# EAGLE board TSOC-ESP8266-EM-2-0 (EAGLE 6.6.0)
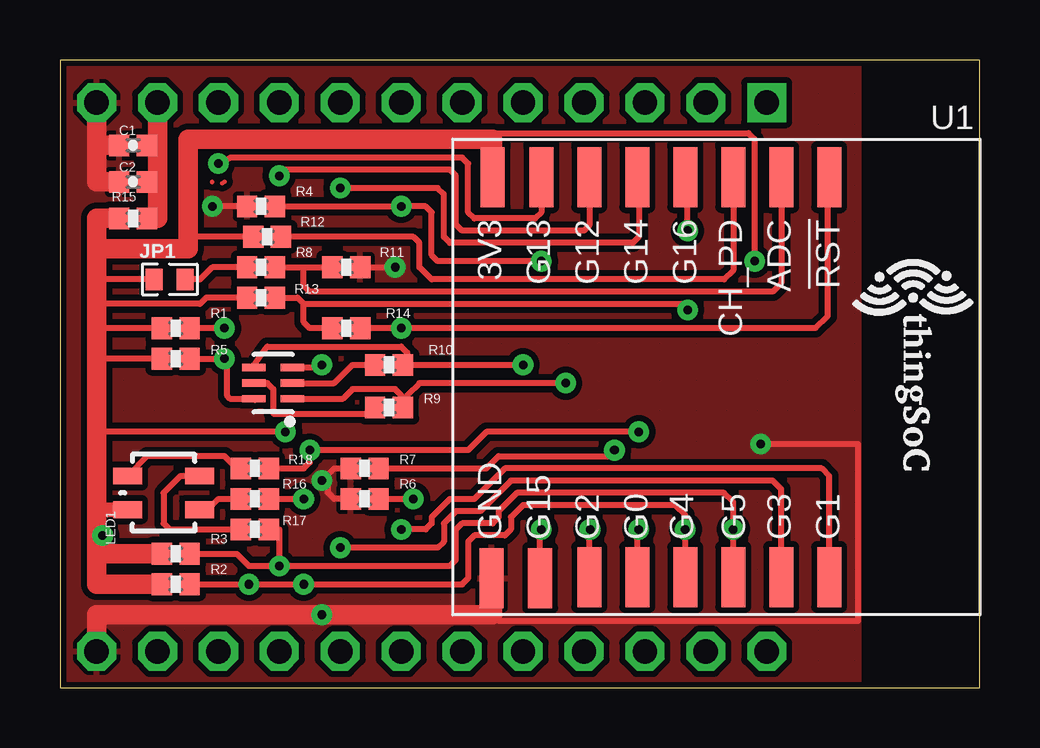
[diagram p0: board, top side]
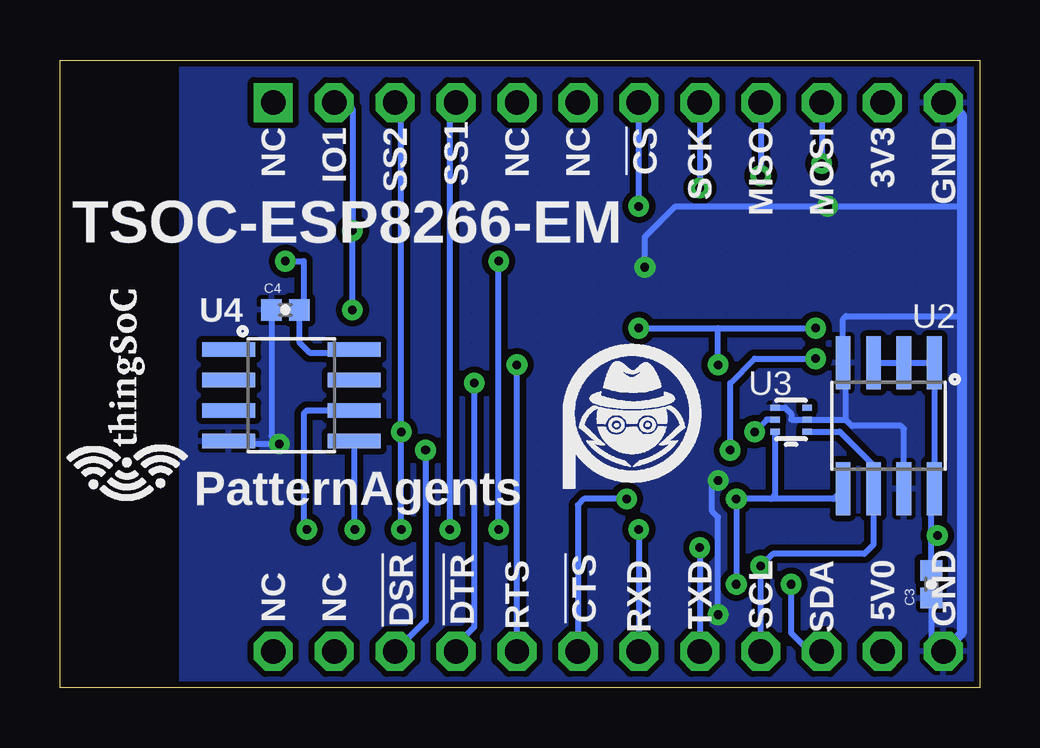
[diagram p1: board, bottom side, seen from below]

Size 38.35 x 26.16 mm. Coordinates in mm from the lower left corner, seen from the top.
Outline: 0,0 38.35,0 38.35,26.16 0,26.16 0,0
Copper layers (1*16): Top 0.035mm / dielectric 1.5mm / Bottom 0.035mm
Design rules "PatternAgents_7mil": minimum track width 7mil, minimum drill 14mil, track to track 7mil, track to pad 7mil, pad to pad 7mil, via to via 7mil, smd to smd 7mil, copper to edge 7mil, drill to drill 7mil, minimum pad ring 12mil, minimum via ring 10mil, stop-mask expansion 4mil, vias tented up to drill 25mil, thermal gap 7mil

## Footprints (pad centres in the part's own frame; a part is rotated, then mirrored left to right if it is on the bottom)
0402-CAP = smd 0.85 x 0.9: 1 -0.58,0; 2 0.58,0
JMP-2-NO-0402 = smd 0.7 x 0.9: 1 -0.65,0; 2 0.65,0
LED-TRICOLOR-SMD = smd 0.7 x 1.2: A 0.7,-1.5; B 0.7,1.5; G -0.7,1.5; R -0.7,-1.5
SOT363 = smd 0.3 x 0.99: 1 -0.65,-0.8; 2 0,-0.8; 3 0.65,-0.8; 4 0.65,0.81; 5 0,0.81; 6 -0.65,0.81
0402-RES = smd 0.85 x 0.9: 1 -0.58,0; 2 0.58,0
TSOC-BB-S24 = drill 1.016 square: 1B -11.43,-11.43 | drill 1.016 octagon: 1C -11.43,11.43; 2B -8.89,-11.43; 2C -8.89,11.43; 3B -6.35,-11.43; 3C -6.35,11.43; 4B -3.81,-11.43; 4C -3.81,11.43; 5B -1.27,-11.43; 5C -1.27,11.43; 6B 1.27,-11.43; 6C 1.27,11.43; 7B 3.81,-11.43; 7C 3.81,11.43; 8B 6.35,-11.43; 8C 6.35,11.43; 9B 8.89,-11.43; 9C 8.89,11.43; 10B 11.43,-11.43; 10C 11.43,11.43; 11B 13.97,-11.43; 11C 13.97,11.43; 12B 16.51,-11.43; 12C 16.51,11.43
ESP8266-12W = smd 1 x 2.5: 3V3 8.888,-8.582; !RST -5.144,-8.582; ADC -3.144,-8.582; CH_PD -1.144,-8.582; G0 2.856,8.082; G1 -5.144,8.082; G2 4.856,8.082; G3 -3.144,8.082; G4 0.856,8.082; G5 -1.144,8.082; G12 4.856,-8.582; G13 6.856,-8.582; G14 2.856,-8.582; G15 6.904,8.126; G16 0.856,-8.582; GND 8.936,8.126
SO08 = smd 0.61 x 2.21: 1 -1.905,-2.616; 2 -0.635,-2.616; 3 0.635,-2.616; 4 1.905,-2.616; 5 1.905,2.616; 6 0.635,2.616; 7 -0.635,2.616; 8 -1.905,2.616
SOT563 = smd 0.25 x 0.4: 1 -0.5,-0.66; 2 0,-0.66; 3 0.5,-0.66; 4 0.5,0.66; 5 0,0.66; 6 -0.5,0.67
SOIC8 = smd 0.61 x 2.21: 1 -1.905,-2.616; 2 -0.635,-2.616; 3 0.635,-2.616; 4 1.905,-2.616; 5 1.905,2.616; 6 0.635,2.616; 7 -0.635,2.616; 8 -1.905,2.616

## Placement (x,y rotation side)
C1  1.0uF  [0402-CAP]  3.05,22.61 180 top
C2  0.1uF  [0402-CAP]  3.05,21.08 180 top
C3  0.1uF  [0402-CAP]  2.03,4.32 90 bottom
C4  0.1uF  [0402-CAP]  28.96,15.75 0 bottom
JP1  [JMP-2-NO-0402]  4.57,17.02 0 top
LED1  LED-TRICOLOR  [LED-TRICOLOR-SMD]  4.32,8.13 270 top
Q1  MMBT2222A  [SOT363]  8.89,12.7 90 top
R1  10K  [0402-RES]  4.83,14.99 180 top
R2  4K7  [0402-RES]  4.83,4.32 180 top
R3  4K7  [0402-RES]  4.83,5.59 180 top
R4  10K  [0402-RES]  8.38,20.07 0 top
R5  10K  [0402-RES]  4.83,13.72 180 top
R6  10K  [0402-RES]  12.7,7.87 0 top
R7  10K  [0402-RES]  12.7,9.14 0 top
R8  10K  [0402-RES]  8.38,17.53 180 top
R9  10K  [0402-RES]  13.72,11.68 180 top
R10  10K  [0402-RES]  13.72,13.46 180 top
R11  4K2  [0402-RES]  11.94,17.53 0 top
R12  10K  [0402-RES]  8.64,18.8 180 top
R13  10K  [0402-RES]  8.38,16.26 180 top
R14  4K7  [0402-RES]  11.94,14.99 0 top
R15  0.01  [0402-RES]  3.05,19.56 0 top
R16  560  [0402-RES]  8.13,7.87 180 top
R17  560  [0402-RES]  8.13,6.6 180 top
R18  560  [0402-RES]  8.13,9.14 180 top
TSOC  TSOC-24-BB  [TSOC-BB-S24]  18.03,12.95 180 top
U1  ESP8266-12-12W  [ESP8266-12W]  26.92,12.7 180 top
U2  EEPROM-I2CSMD  [SO08]  3.81,10.92 180 bottom
U3  TMP102  [SOT563]  7.87,11.18 90 bottom
U4  ATECC108  [SOIC8]  28.7,12.19 270 bottom
U$11  PA_LOGO_SYMMED  [PA_LOGO_AGENT_MED_SYM]  14.48,10.92 0 bottom
U$19  TSOC-LOGO-MED  [TSOC-LOGO-MED]  35.56,9.4 90 bottom
U$20  TSOC-LOGO-MED  [TSOC-LOGO-MED]  35.56,16.26 270 top

## Library data of the parts
C1-C4 R1-R18 = PatternAgents-ProtoPads
JP1 = PatternAgents-ProtoPads; BOM: EXCLUDE
LED1 = SparkFun-LED
Q1 = SparkFun-DiscreteSemi
TSOC U$19 U$20 = thingSoC
U1 = PatternAgents_RFmodules
U2 = SparkFun-DigitalIC
U3 = SparkFun-Sensors; PROD_ID: IC-09303
U4 = SparkFun-DigitalIC; PROD_ID: IC-11982
U$11 = PatternAgents-Logos

## Nets
3V3: C3.2 C4.2 JP1.1 LED1.A R1.2 R2.2 R3.2 R5.2 R12.2 R13.2 R15.1 U1.3V3 U2.1 U2.2 U2.3 U2.8 U3.5 U4.8
3V3I: C1.1 C2.1 R15.2 TSOC.11B
!CTS: R6.2 TSOC.6C
!DCD: TSOC.2C
!DSR: R7.2 TSOC.3C
!DTR: Q1.1 R9.1 TSOC.4C
!RI: TSOC.1C
!RST: Q1.3 R1.1 R14.2 U1.!RST
!RTS: Q1.4 R10.1 TSOC.5C
ADC: R8.1 R11.1 U1.ADC
ADC_RAW: JP1.2 R8.2
BLU: LED1.B R16.2
CH_PD: R12.1 U1.CH_PD
GND: C1.2 C2.2 C3.1 C4.1 R4.1 R6.1 R7.1 R11.2 TSOC.12B TSOC.12C U1.GND U2.4 U2.7 U3.2 U3.4 U4.4
GPIO0: Q1.6 R5.1 R18.1 TSOC.3B U1.G0
GPIO1: TSOC.7C U1.G1
GPIO2: TSOC.4B U1.G2
GPIO3: TSOC.8C U1.G3
GPIO4: R2.1 R16.1 TSOC.10C U1.G4 U2.5 U3.6 U4.5
GPIO5: R3.1 R17.1 TSOC.9C U1.G5 U2.6 U3.1 U4.6
GPIO12: TSOC.9B U1.G12
GPIO13: TSOC.10B U1.G13
GPIO14: TSOC.8B U1.G14
GPIO15: R4.2 TSOC.7B U1.G15
GPIO16: R13.1 R14.1 TSOC.2B U1.G16
GRN: LED1.G R17.2
N$6: Q1.5 R9.2
N$12: Q1.2 R10.2
RED: LED1.R R18.2

## Tracks (layer width: path | path; a pad name or v marks a point on that pad's centre or on a via)
3V3  (via drill 0.36)
  Top 0.178: v1.78,6.35 1.52,6.35
  Top 0.254: R12.2 5.33,18.8 | R1.2 1.52,14.99 | JP1.1 1.52,17.02 | R13.2 6.1,16.26 5.84,16 1.78,16 1.52,16.26 | R5.2 1.52,13.72 | v9.4,10.67 1.78,10.67 1.52,10.92 | U1.3V3 18.04,23.11 18.03,23.11 28.7,23.11 28.96,22.86 v28.96,17.78
  Top 0.61: 1.5,10.14 1.52,10.41 | LED1.A 1.72,7.43 1.52,7.62
  Top 0.813: 1.52,18.29 1.52,19.56 R15.1 | 1.52,18.29 1.52,17.02 1.52,16.26 1.52,14.99 1.52,13.72 1.52,10.92 1.52,10.41 1.52,7.62 1.52,6.35 1.52,5.59 | 1.52,5.59 1.52,4.32 R2.2 | R3.2 1.52,5.59 | U1.3V3 18.03,22.86 5.33,22.86 5.33,18.8 5.33,18.29 1.52,18.29
  Bottom 0.178: v1.78,6.35 2.03,6.35
  Bottom 0.254: U2.3 U2.2 U2.1 U2.8 2.03,8.18 2.03,6.35 C3.2 | U3.5 8.89,11.18 v9.4,10.67 | U4.8 26.21,13.97 27.94,13.97 28.38,14.41 C4.2 28.19,15.93 28.19,17.78 v28.96,17.78
3V3I
  Top 0.813: TSOC.11B 4.06,22.61 | 4.06,22.61 4.06,21.08 | 4.06,21.08 4.06,19.56 R15.2 | C1.1 4.06,22.61 | C2.1 4.06,21.08
!CTS  (via drill 0.36)
  Top 0.254: R6.2 v14.73,7.87
  Bottom 0.254: v14.73,7.87 16.51,7.87 16.76,7.62 TSOC.6C
!DSR  (via drill 0.36)
  Top 0.254: R7.2 17.78,9.14 18.29,9.65 22.86,9.65 v23.11,9.91
  Bottom 0.254: v23.11,9.91 23.11,2.79 TSOC.3C
!DTR  (via drill 0.36)
  Top 0.254: 14.55,11.94 R9.1 | R9.1 14.3,12.12 13.97,12.45 12.19,12.45 11.8,12.05 Q1.1 | v21.08,12.7 14.99,12.7 14.48,12.19 14.48,11.87 R9.1
  Bottom 0.254: TSOC.4C 21.84,1.78 21.08,2.54 v21.08,12.7
!RST  (via drill 0.36)
  Top 0.178: U1.!RST 32,21.34 32,21.22
  Top 0.254: 32,21.22 32,15.49 31.5,14.99 v14.22,14.99 R14.2 12.45,14.91 | Q1.3 10.81,13.35 v10.92,13.46 | v6.86,14.99 R1.1
  Bottom 0.254: v14.22,14.99 10.92,14.99 | 10.92,14.99 v6.86,14.99 | v10.92,13.46 10.92,14.99
!RTS  (via drill 0.36)
  Top 0.254: v19.3,13.46 R10.1 14.48,13.64 14.48,13.97 14.22,14.22 8.64,14.22 8.08,13.41 Q1.4
  Bottom 0.254: TSOC.5C v19.3,13.46
ADC
  Top 0.254: R8.1 10.16,17.53 | 10.16,17.53 R11.1 | U1.ADC 30.07,16.86 29.72,16.51 10.41,16.51 10.16,16.76 10.16,17.53
ADC_RAW
  Top 0.254: R8.2 6.35,17.53 5.84,17.02 JP1.2
BLU
  Top 0.254: 7.29,8.13 R16.2 6.6,7.87 6.16,7.43 LED1.B
CH_PD
  Top 0.254: U1.CH_PD 28.07,17.4 27.69,17.02 15.49,17.02 14.99,17.53 14.99,18.54 14.73,18.8 R12.1
GND  (via drill 0.36)
  Top 0.254: R4.1 v6.35,20.07 | R11.2 v13.97,17.53 | R7.1 11.43,9.14 v10.92,8.64 11.18,8.38 11.18,8.13 11.43,7.87 R6.1 | 18.03,4.57 18.03,3.05 18.29,2.79 33.27,2.79 33.27,10.16 v29.21,10.16
  Top 0.61: U1.GND 18.03,4.57 18.03,3.81
  Top 0.813: 18.03,3.81 18.03,3.05 v10.92,3.05 1.52,3.05 TSOC.12C | TSOC.12B 1.52,22.61 | 1.52,22.61 C1.2 | C2.2 1.52,21.08 1.52,22.61
  Bottom 0.254: 0.76,20.07 v6.35,20.07 12.7,20.07 13.97,18.8 v13.97,17.53 | v10.92,3.05 10.92,7.11 11.18,7.37 11.18,8.38 v10.92,8.64 | U2.7 3.18,10.8 3.3,10.92 5.33,10.92 5.59,11.18 | 5.59,11.18 5.59,13.41 U2.4 5.72,15.37 5.59,15.49 0.76,15.49 | C3.1 2.03,2.03 TSOC.12C | U3.4 8.12,11.68 7.87,11.43 7.87,11.18 U3.2 5.59,11.18 | U4.4 31.19,10.16 v29.21,10.16 29.54,10.49 C4.1
  Bottom 0.406: TSOC.12B 1.27,24.38 0.76,23.88 0.76,20.07 0.76,15.49 0.76,2.29 TSOC.12C
  pour Bottom (isolate 0.254, hatched): 0,-0.25 0,26.42 33.27,26.42 33.27,-0.25
  pour Top (isolate 0.254, hatched): 0,-0.25 0,26.42 33.27,26.42 33.27,-0.25
GPIO0  (via drill 0.36)
  Top 0.254: U1.G0 24.07,6.54 v24.13,6.6 | R5.1 v6.86,13.72 6.97,13.61 6.97,12.16 7.08,12.05 Q1.6 8.13,12 | v24.13,10.67 17.78,10.67 17.02,9.91 v10.41,9.91 10.41,9.4 10.16,9.14 R18.1
  Bottom 0.254: v24.13,6.6 v24.13,10.67 24.13,24.13 TSOC.3B | v10.41,9.91 10.41,12.7 9.4,13.72 v6.86,13.72
GPIO1  (via drill 0.36)
  Top 0.254: U1.G1 32.07,8.83 31.75,9.14 18.54,9.14 17.27,7.87 16.26,7.87 15.49,7.11 15.49,6.86 15.24,6.6 v14.22,6.6
  Bottom 0.254: v14.22,6.6 TSOC.7C
GPIO2  (via drill 0.36)
  Top 0.254: U1.G2 22.07,6.57 v22.1,6.6
  Bottom 0.254: v22.1,6.6 22.1,24.13 TSOC.4B
GPIO3  (via drill 0.36)
  Top 0.254: U1.G3 30.07,8.29 29.72,8.64 18.8,8.64 17.53,7.37 16.51,7.37 16,6.86 16,6.1 15.75,5.84 v11.68,5.84
  Bottom 0.254: v11.68,5.84 TSOC.8C
GPIO4  (via drill 0.36)
  Top 0.254: U1.G4 v26.07,6.6 26.07,7.21 25.65,7.62 19.3,7.62 18.8,7.11 18.8,6.6 18.54,6.35 17.27,6.35 17.02,6.1 17.02,4.57 16.76,4.32 v10.16,4.32 v7.87,4.32 R2.1 | R16.1 v10.16,7.87
  Bottom 0.254: TSOC.10C 7.11,1.52 7.87,2.29 v7.87,4.32 | U2.5 5.72,8.26 6.1,7.87 R16.1 | R16.1 v10.16,7.87 v10.16,4.32 | U3.6 8.54,8.04 R16.1 | U4.5 26.09,6.62 v26.07,6.6
GPIO5  (via drill 0.36)
  Top 0.254: U1.G5 v28.07,6.6 28.07,7.75 27.69,8.13 19.05,8.13 18.29,7.37 18.29,7.11 18.03,6.86 16.76,6.86 16.51,6.6 16.51,5.33 16.26,5.08 v9.14,5.08 | R3.1 7.37,5.59 7.87,5.08 v9.14,5.08 | R17.1 9.14,6.6 v9.14,5.08
  Bottom 0.254: TSOC.9C v9.14,5.08 8.64,5.59 4.83,5.59 4.45,5.97 U2.6 4.32,8.43 4.32,9.14 5.85,10.68 U3.1 | U4.6 28.07,11.56 28.19,11.43 28.19,6.73 v28.07,6.6
GPIO12  (via drill 0.36)
  Top 0.254: U1.G12 22.07,19.27 21.84,19.05 16.76,19.05 16.51,19.3 16.51,21.34 16.26,21.59 9.4,21.59 v9.14,21.34
  Bottom 0.254: TSOC.9B v9.14,21.34
GPIO13  (via drill 0.36)
  Top 0.254: U1.G13 20.07,19.81 19.81,19.56 17.27,19.56 17.02,19.81 17.02,21.84 16.76,22.1 7.11,22.1 v6.6,21.84
  Bottom 0.254: TSOC.10B v6.6,21.84
GPIO14  (via drill 0.36)
  Top 0.254: U1.G14 24.13,21.22 24.13,18.8 23.88,18.54 16.26,18.54 16,18.8 16,20.57 15.75,20.83 v11.68,20.83
  Bottom 0.254: TSOC.8B v11.68,20.83
GPIO15  (via drill 0.36)
  Top 0.254: U1.G15 20.02,6.3 v20.07,6.6 | v20.07,17.78 15.75,17.78 15.49,18.03 15.49,19.81 15.24,20.07 v14.22,20.07 R4.2
  Bottom 0.254: v20.07,6.6 v20.07,17.78 | v14.22,20.07 TSOC.7B
GPIO16  (via drill 0.36)
  Top 0.254: 26.16,21.38 U1.G16 26.16,21.19 v26.16,19.05 | R13.1 9.91,16.26 10.16,16 | 10.16,16 25.91,16 v26.16,15.75 | R14.1 10.41,14.99 10.16,15.24 10.16,16
  Bottom 0.254: v26.16,15.75 v26.16,19.05 26.16,24.13 26.42,24.38 TSOC.2B
GRN
  Top 0.254: LED1.G 5.02,8.83 4.32,8.13 4.32,6.86 4.57,6.6 R17.2
N$1
  Top 0.178: 6.86,21.08 6.77,21.03 | 6.35,21.08 6.35,21.07
N$6
  Top 0.254: Q1.5 8.64,12.7 8.89,12.45 8.89,11.43 12.88,11.43 R9.2
N$12
  Top 0.254: Q1.2 11.43,12.7 12.19,13.46 R10.2
RED
  Top 0.254: R18.2 7.37,9.14 6.86,9.65 3.64,9.65 LED1.R

## Text on the board
bPlace: SS1 | GND | 3V3 | MOSI | MISO | SCK | !CS | NC | NC | SS2 | IO1 | NC | TSOC-ESP8266-EM | U3 | PatternAgents | !CTS | !DTR | !DSR | 5V0 | SDA | SCL | TXD | RXD | RTS | NC | NC | GND